# Allegro board demob2.brd
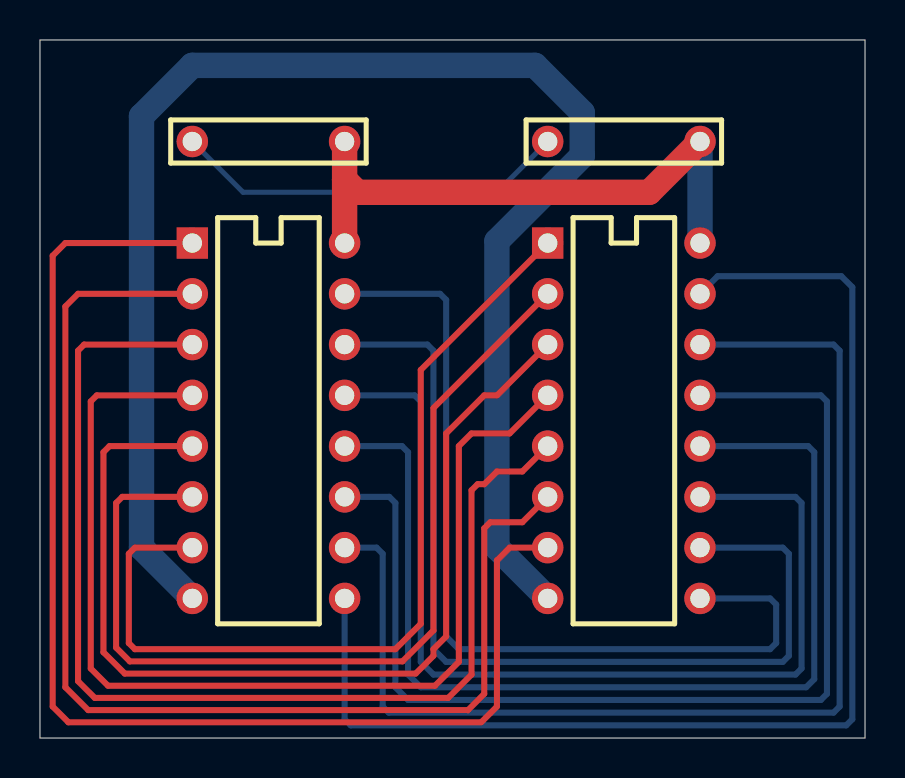
[diagram p0: board, top side]
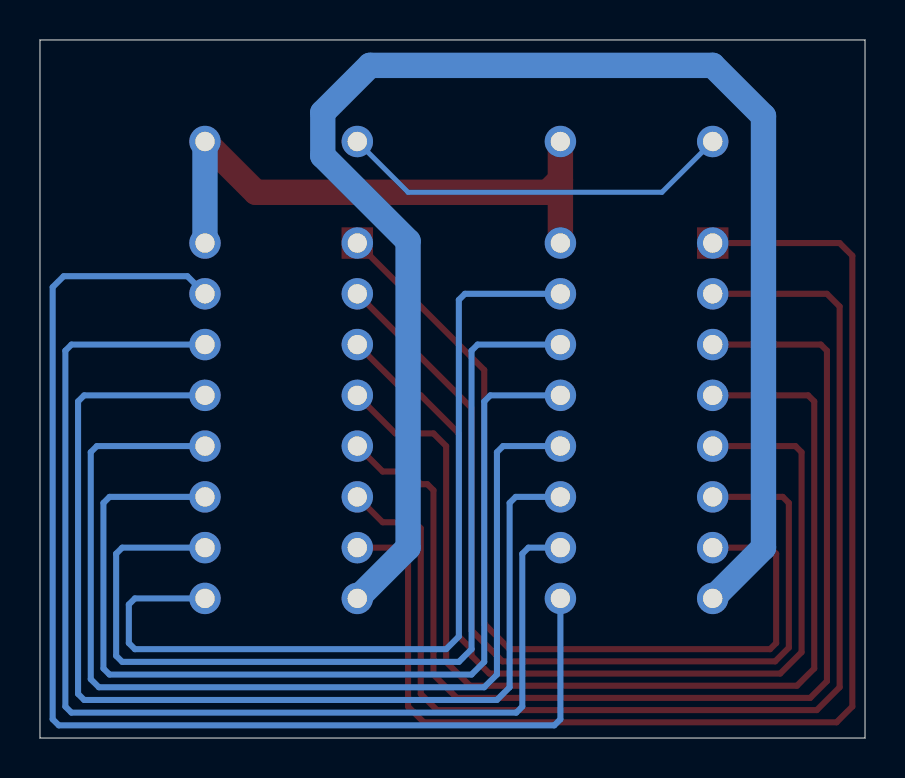
[diagram p1: board, bottom side, seen from below]

Outline 41.27 x 34.93 mm; copper layers: TOP, GND, POWER, INNER1, INNER2, BOTTOM. Coordinates in mm from the lower left corner of the outline.
Outline path: 0,34.93 41.27,34.93 41.27,0 0,0 0,34.93

## Design rules (mm)
nets with their own width: min track width 0.254; nets GND_SIGNAL
nets with their own width: min track width 0.305; nets N01899 N01900 N01901 N01902 N01903 N01904 N01905 N01906 N01907 N01908 N01909 N01910 N01911 N01912
nets with their own width: min track width 1.27; nets GND VCC

## Placement (name value [footprint] x y rotation side)
C1  CAP NP  [AC300100A]  15.24 29.85 180 top
C2  CAP NP  [AC300100A]  33.02 29.85 180 top
U1  74LS158  [DIP16]  7.62 24.77 270 top
U2  74LS158  [DIP16]  25.4 24.77 270 top

## Library data of the parts
C1 C2 = CAP_NP
U1 U2 = 74LS158

## Footprints (pads in the part's own frame, mm; a bottom-side part is the same pattern mirrored in y, then rotated)
AC300100A
  round 1.575 hole 0.965: 1(0,0) 2(7.62,0)
DIP16
  rect 1.575x1.575 hole 0.965: 1(0,0)
  round 1.575 hole 0.965: 2(2.54,0) 3(5.08,0) 4(7.62,0) 5(10.16,0) 6(12.7,0) 7(15.24,0) 8(17.78,0) 9(17.78,7.62) 10(15.24,7.62) 11(12.7,7.62) 12(10.16,7.62) 13(7.62,7.62) 14(5.08,7.62) 15(2.54,7.62) 16(0,7.62)

## Nets
GND: U1.8(TP-8) U2.8(TP-8)
GND_SIGNAL: C1.2(TP-2) C2.2(TP-2)
VCC: C1.1(TP-1) C2.1(TP-1) U1.16(TP-16) U2.16(TP-16)
N01899: U1.2(TP-2) U2.6(TP-6)
N01900: U1.3(TP-3) U2.5(TP-5)
N01901: U1.4(TP-4) U2.4(TP-4)
N01902: U1.5(TP-5) U2.3(TP-3)
N01903: U1.6(TP-6) U2.2(TP-2)
N01904: U1.7(TP-7) U2.1(TP-1)
N01905: U1.9(TP-9) U2.15(TP-15)
N01906: U1.10(TP-10) U2.14(TP-14)
N01907: U1.11(TP-11) U2.13(TP-13)
N01908: U1.12(TP-12) U2.12(TP-12)
N01909: U1.14(TP-14) U2.10(TP-10)
N01910: U1.1(TP-1) U2.7(TP-7)
N01911: U1.13(TP-13) U2.11(TP-11)
N01912: U1.15(TP-15) U2.9(TP-9)

## Routing (per net, layer and track width the routed paths; a pad name or vN(x,y) marks a point on that pad's centre or on a via; arc(x,y) is an arc through that point)
GND: length 76.4
  BOTTOM w1.27: U2.8 22.86,9.52 22.86,24.86 27.13,29.13 27.13,31.29 24.77,33.66 7.62,33.66 5.08,31.11 5.08,9.52 U1.8
GND_SIGNAL: length 19.9
  BOTTOM w0.254: C1.2 10.16,27.3 22.86,27.3 C2.2
VCC: length 29.3
  TOP w1.27: 15.24,27.94 15.88,27.3 30.48,27.3 C2.1 ; 15.24,27.94 U1.16 ; 15.24,27.94 C1.1
  BOTTOM w1.27: C2.1 U2.16
N01899: length 59.5
  TOP w0.305: U1.2 1.91,22.22 1.27,21.59 1.27,2.54 2.41,1.4 21.41,1.4 22.23,2.21 22.23,10.49 22.53,10.8 24.13,10.8 U2.6
N01900: length 56.8
  TOP w0.305: U1.3 2.21,19.68 1.91,19.38 1.91,2.84 2.74,2.01 20.42,2.01 21.59,3.17 21.59,12.4 21.89,12.7 22.23,12.7 22.86,13.34 24.13,13.34 U2.5
N01901: length 54.1
  TOP w0.305: U2.4 23.5,15.24 21.59,15.24 20.95,14.61 20.95,3.81 19.76,2.62 3.4,2.62 2.54,3.48 2.54,16.84 2.84,17.14 U1.4
N01902: length 50.2
  TOP w0.305: U1.5 3.48,14.61 3.17,14.3 3.17,4.29 4.24,3.23 18.8,3.23 19.68,4.11 19.68,4.45 20.32,5.08 20.32,15.24 22.23,17.14 22.86,17.14 U2.3
N01903: length 47.2
  TOP w0.305: U1.6 4.11,12.07 3.81,11.76 3.81,4.52 4.5,3.84 18.14,3.84 19.68,5.38 19.68,16.51 U2.2
N01904: length 44.7
  TOP w0.305: U1.7 4.75,9.52 4.45,9.22 4.45,4.75 4.75,4.45 17.78,4.45 19.05,5.72 19.05,18.41 U2.1
N01905: length 61.5
  BOTTOM w0.305: U2.15 33.9,23.11 40.09,23.11 40.64,22.56 40.64,0.94 40.34,0.64 15.54,0.64 15.24,0.94 U1.9
N01906: length 57.7
  BOTTOM w0.305: U1.10 16.84,9.52 17.14,9.22 17.14,1.57 17.45,1.27 39.7,1.27 40.01,1.57 40.01,19.38 39.7,19.68 U2.14
N01907: length 55
  BOTTOM w0.305: U2.13 39.07,17.14 39.37,16.84 39.37,2.21 39.07,1.91 18.41,1.91 17.78,2.54 17.78,11.76 17.48,12.07 U1.11
N01908: length 52.4
  BOTTOM w0.305: U2.12 38.43,14.61 38.73,14.3 38.73,2.95 38.33,2.54 19.05,2.54 18.41,3.17 18.41,14.3 18.11,14.61 U1.12
N01909: length 47.4
  BOTTOM w0.305: U2.10 37.16,9.52 37.47,9.22 37.47,4.11 37.16,3.81 20.32,3.81 19.68,4.45 19.68,19.38 19.38,19.68 U1.14
N01910: length 62.8
  TOP w0.305: U1.1 1.27,24.77 0.64,24.13 0.64,1.57 1.42,0.79 22.07,0.79 22.86,1.57 22.86,8.89 23.5,9.52 U2.7
N01911: length 49.9
  BOTTOM w0.305: U1.13 18.75,17.14 19.05,16.84 19.05,3.81 19.68,3.17 37.8,3.17 38.1,3.48 38.1,11.76 37.8,12.07 U2.11
N01912: length 44.8
  BOTTOM w0.305: U1.15 20.02,22.22 20.32,21.92 20.32,5.08 20.95,4.45 36.53,4.45 36.83,4.75 36.83,6.68 36.53,6.99 U2.9
